# Altium PCB vlc_ctrl_T67.PcbDoc
Units mil, origin at the board's own origin, x right, y up, seen from the top; angles counter-clockwise.
Board outline 1000 x 850 mil, 2 copper layers (Top Layer, Bottom Layer); 16 components, 12 nets, 46 pads, 1 vias.
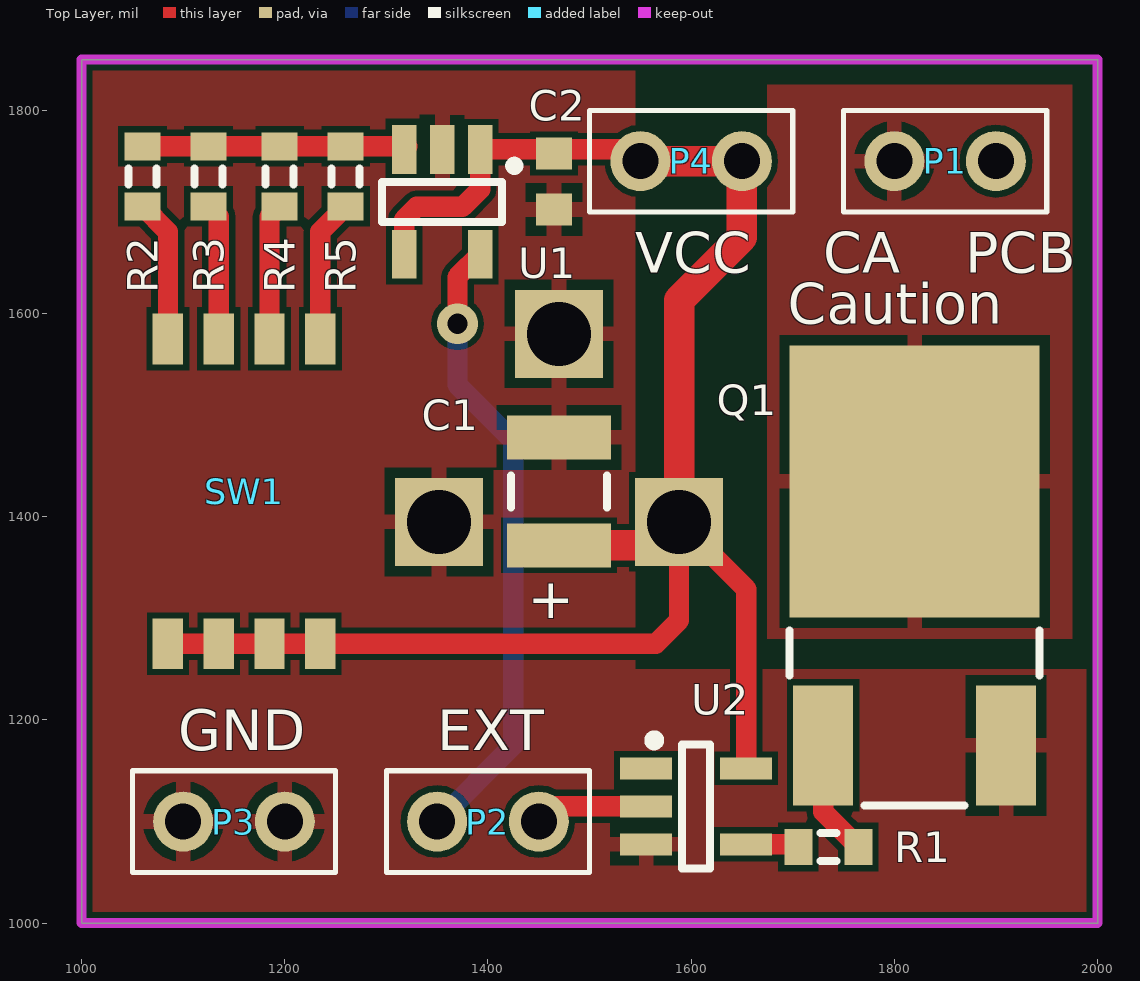
[diagram p0: Top Layer view]
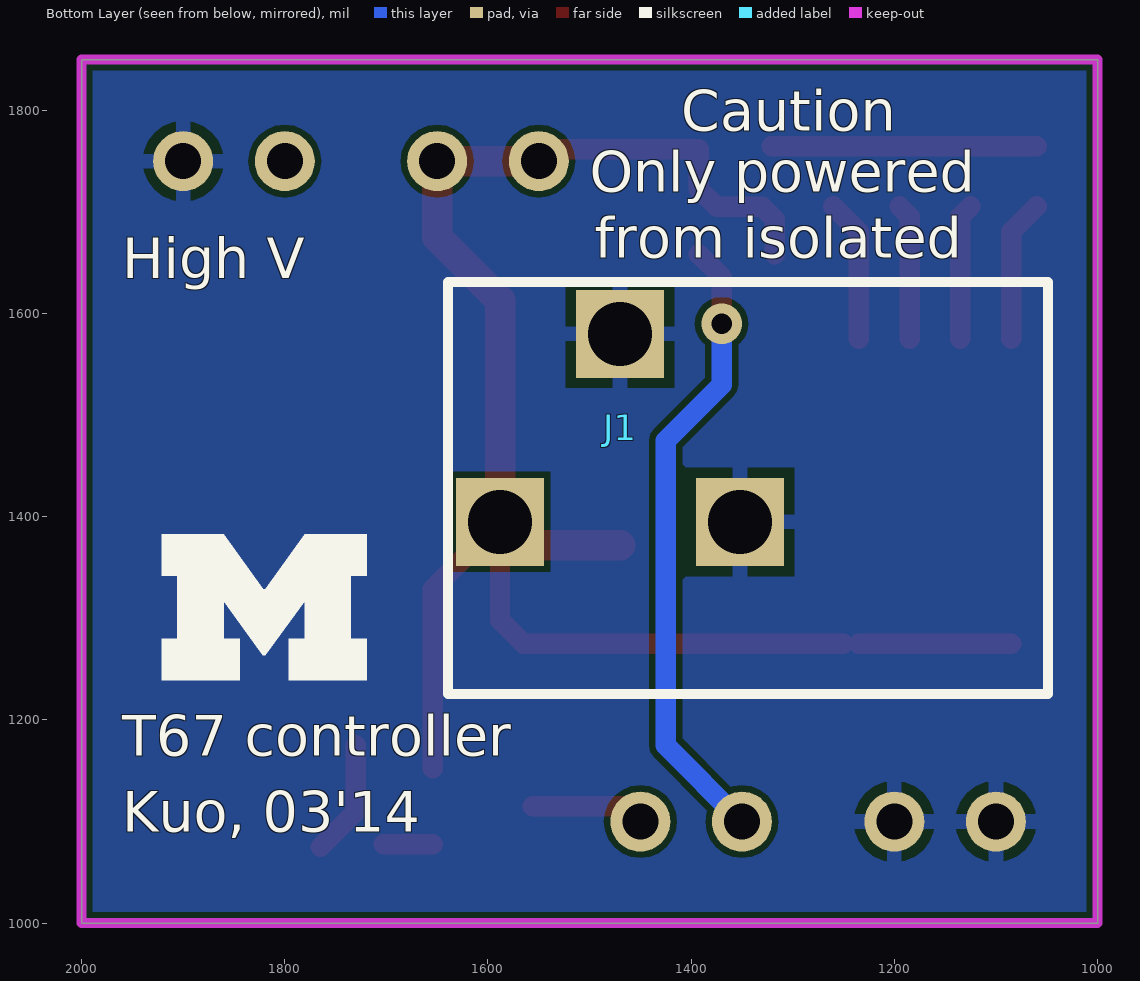
[diagram p1: Bottom Layer view, seen from below]

## Layer stack, top to bottom
Top Solder: solder mask 0.4, Solder Resist, Dk 3.5
Top Layer: signal copper 1.4
Dielectric 1: dielectric 12.6, FR-4, Dk 4.8
Bottom Layer: signal copper 1.4
Bottom Solder: solder mask 0.4, Solder Resist, Dk 3.5

## Board outline
1000,1000 1000,1850 2000,1850 2000,1000

## Design rules (kind name [scope] priority, off if disabled: settings)
Clearance "Clearance~Sunstone Circuits" [All] p1: gap=6 // Sunstone Circuits Minimum Clearance Rule (Double Sided)
HoleSize "HoleSize~Sunstone Circuits" [All] p1: absolutevalues=TRUE maxlimit=251 minlimit=16 maxpercent=80.000 minpercent=20.000 // SSC Hole Size Rule For Single Sided & Double Sided Designs.
HoleSize Testpoint [All] p2: absolutevalues=TRUE maxlimit=100 minlimit=1 maxpercent=80.000 minpercent=20.000
HoleSize TestPointUsage [All] p3: absolutevalues=TRUE maxlimit=100 minlimit=1 maxpercent=80.000 minpercent=20.000
MinimumAnnularRing "MinimumAnnularRing~Sunstone Circuits" [All] p1: minimumring=7 // Sunstone Circuits Minimum Annular Ring (Double Sided)
PlaneClearance "PlaneClearance~Sunstone Circuits" [All] p1: clearance=12 // Sunstone Circuits Power Plane Clearance Rule (Double Sided)
PlaneConnect "PlaneConnect~Sunstone Circuits" [All] p1: planeconnectstyle=Relief reliefexpansion=10 reliefentries=4 reliefconductorwidth=8 reliefairgap=10 // Sunstone Circuits Power Plane Connect Rule (Double Sided)
PolygonConnect "PolygonConnect~Sunstone Circuits" [All] p1: connectstyle=Relief reliefconductorwidth=15 reliefentries=4 polygonreliefangle="90 Angle" airgapwidth=10 // Sunstone Circuits Polygon Connect Style (Double Sided)
RoomDefinition vlc_ctrl_T67 [InComponentClass('vlc_ctrl_T67')] p1: confinementstyle=ConfineIn formatcopy=TRUE lockcomponents=FALSE outline 1026.38,1675.79 1026.38,1794.21 1282.01,1794.21 1282.01,1798.59 1487.5,1798.59 1487.5,1812.5 1962.5,1812.5 1962.5,1687.5 1959.92,1687.5 1959.92,1102.01 1848.62,1102.01 1848.62,1045.79 1695.71,1045.79 1695.71,1038.07 1512.5,1038.07 1512.5,1037.5 1037.5,1037.5 1037.5,1210.71 1031.35,1210.71 1031.35,1675.79
RoutingVias "RoutingVias~Sunstone Circuits" [All] p1: holewidth=16 width=30 viastyle="Through Hole" minholewidth=16 minwidth=30 maxholewidth=20 maxwidth=40 // Sunstone Circuits Routing Vias Rule (Double Sided)
ShortCircuit "ShortCircuit~Sunstone Circuits" [All] p1: allowed=FALSE // Sunstone Circuits Short Circuit Rule~Do Not Allow (Double Sided)
SolderMaskExpansion "SolderMaskExpansion~Sunstone Circuits" [All] p1: expansion=3 // Sunstone Circuits Solder Mask Expansion Rule (Double Sided)
ViasUnderSMD "ViasUnderSMD~Sunstone Circuits" [All] p1: allowed=FALSE // Sunstone Circuits Vias Under SMD~Do Not Allow (Double Sided)
Width "Width~Sunstone Circuits" [All] p1: maxlimit=100 minlimit=6 preferedwidth=10 // Sunstone Circuits Minimum Width Rule (Double Sided)
25 further rules are at their usual default settings.

## Components (designator, comment, footprint, x,y, rotation, side; value= is the part's Value field where it differs from the comment)
C1 "Cap Semi" C1210 1470,1425 r270 top
C2 "Cap Semi" 1608[0603] 1465,1730 r90 top
J1 "PJ-102AH" PJ-102AH 1470,1395 r270 bottom
P1 "1 x 2 header" "1x2 header" 1850,1750 r0 top
P2 "1 x 2 header" "1x2 header" 1400,1100 r0 top
P3 "1 x 2 header" "1x2 header" 1150,1100 r180 top
P4 "1 x 2 header" "1x2 header" 1600,1750 r180 top
Q1 "AOD3N60" TO252 1820,1175 r0 top
R1 "Res3" J1-0603 1735,1075 r180 top
R2 "Res3" J1-0603 1060,1735 r270 top
R3 "Res3" J1-0603 1125,1735 r270 top
R4 "Res3" J1-0603 1195,1735 r270 top
R5 "Res3" J1-0603 1260,1735 r270 top
SW1 "CHS-04TB" CHS04TB 1160,1425 r0 top
U1 "LTC6900" TSOT23 1355,1710 r180 top
U2 "SN74LVC1G17" SOT23-5 1605,1115 r0 top

## Footprints (in the part's own frame and the unit in brackets; to place one, negate y for a bottom-side part, rotate by r counter-clockwise, add the part's x,y. Pads: shape width x height; smd on the part's side, far side on the other; paste and mask are expansions set on the pad)
"1x2 header" [mm] "1x2 header, 100 mils"
  round 1.5 hole 0.9: 1(-1.27,0) 2(1.27,0)
  silkscreen extent -2.54,-1.27 2.54,1.27, body extent -2.53,-1.26 2.53,1.26, height 8.38
1608[0603] [mm] "Chip Capacitor, Body 1.6x0.8mm, IPC High Density"
  rect 0.8x0.9 smd: 1(-0.7,0) 2(0.7,0)
  body extent -0.87,-0.48 0.87,0.48, height 1.3
C1210 [mm] "Chip Capacitor, Body 3.2x2.5mm, IPC High Density"
  rect 1.1x2.6 smd: 1(-1.35,0) 2(1.35,0)
  silkscreen extent -0.4,-1.2 0.4,1.2, body extent -1.7,-1.35 1.7,1.35, height 1.3
CHS04TB [mm] "4 POS DIP SWITCH"
  rect 0.76x1.27 smd: 1(-1.905,-3.81) 2(-1.905,3.81) 3(-0.635,-3.81) 4(-0.635,3.81) 5(0.635,-3.81) 6(0.635,3.81) 7(1.905,-3.81) 8(1.905,3.81)
J1-0603 [mm] "Chip Resistor, Body 1.6x0.8mm, IPC High Density"
  rect 0.7x0.9 smd: 1(-0.75,0) 2(0.75,0)
  silkscreen extent -0.2,-0.35 0.2,0.35, body extent -0.85,-0.48 0.85,0.48, height 0.9
PJ-102AH [mm] "Power Jack"
  rect 2.2x2.2 hole 1.6: 1(0,-3) 2(0,3) 3(-4.7,0)
  silkscreen extent -6,-4.3 4.3,10.7, body extent -5.75,-3.99 4.08,10.89, height 10
SOT23-5 [mm] "SOT23, 5-Leads, Body 2.9x1.6mm, Pitch 0.95mm, Lead Span 2.8mm, IPC High Density"
  rect 1.3x0.55 smd: 1(-1.25,0.95) 2(-1.25,0) 3(-1.25,-0.95) 4(1.25,-0.95) 5(1.25,0.95)
  silkscreen extent -1.17,-1.55 0.35,1.77, body extent -0.67,-1.5 0.65,1.5, height 1.45
TO252 [mm] "TO252-3"
  rect 1.5x3 smd: 1(-2.286,0) 3(2.286,0)
  rect 6.25x6.8 smd: 4(0,6.6)
  silkscreen extent -3.13,-1.5 3.13,2.88, body extent -3.3,2.98 3.3,9.08, height 2.3
TSOT23 [mm]
  rect 0.62x1.22 smd: 1(-0.95,-1.31) 2(0,-1.31) 3(0.95,-1.31) 4(0.95,1.31) 5(-0.95,1.31)
  silkscreen extent -1.9,-1 1.5,0.5

## Part data
C1 C2: "Capacitor (Semiconductor SIM Model)"
J1: "CONN PWR JACK 2.1X5.5MM HIGH CUR"
P1 P2 P3 P4: "100 mils standard header"
Q1: "600V,2.5A N-Channel MOSFET"
R1 R2 R3 R4 R5: "Resistor"
SW1: "SLIDE SWITCHES"
U1: "Low Power, 1kHz to 20MHz   Resistor Set SOT-23 Oscillator"
U2: "SINGLE SCHMITT-TRIGGER BUFFER"

## Via types
v1: diameter 40, hole 20, Top Layer to Bottom Layer, 1 vias

## Nets (pads, with @x,y where several pads share a name; then routed paths per layer and width w, separated by ;. In a path a pad name is that pad's centre, name@x,y a point inside that pad or via, vN(x,y) a via of type N, cw(c..) or ccw(c..) an arc to the next point about the centre after c; other vN are vias at no path point)
GND: C1.1 C2.1 J1.2 J1.3 P1.2 P3.1 P3.2 Q1.3 U1.2 U2.3
NetP1_1: P1.1 Q1.4
NetP2_1: P2.1 U1.5 | length 621.6
  Top Layer w20: v1(1370,1590) 1370,1636.02 U1.5
  Bottom Layer w20: P2.1 1425,1175 1425,1475 1370,1530 v1(1370,1590)
NetP2_2: P2.2 U2.2 | length 112
  Top Layer w20: P2.2 1465,1115 U2.2
NetQ1_1: Q1.1 R1.1 | length 114.3
  Top Layer w20: Q1.1 1730,1109.53 R1.1
NetR1_2: R1.2 U2.4 | length 48.7
  Top Layer w20: U2.4 R1.2@1702.87,1077.6
NetR2_1: R2.1 R3.1 R4.1 R5.1 U1.3 | length 260.6
  Top Layer w20: R2.1 R3.1 R4.1 R5.1 U1.3@1320.55,1764.53
NetR2_2: R2.2 SW1.2 | length 140.8
  Top Layer w20: R2.2 1085,1680.47 SW1.2
NetR3_2: R3.2 SW1.4 | length 134.6
  Top Layer w20: R3.2 1135,1695.47 SW1.4
NetR4_2: R4.2 SW1.6 | length 134.6
  Top Layer w20: SW1.6 1185,1695.47 R4.2
NetR5_2: R5.2 SW1.8 | length 140.8
  Top Layer w20: SW1.8 1235,1680.47 R5.2
VCC5: C1.2 C2.2 J1.1 P4.1 P4.2 SW1.1 SW1.3 SW1.5 SW1.7 U1.1 U1.4 U2.5 | length 1795.8
  Top Layer w20: SW1.1 SW1.3 SW1.5 SW1.7 ; 1250,1275 1565,1275 1588.11,1298.11 J1.1 1654.21,1328.9 U2.5 ; U1.4 1317.6,1692.6 1330,1705 1375,1705 1392.4,1722.4 U1.1 1538.43,1761.57 P4.2
  Top Layer w30: C1.2 1564.96,1371.85 J1.1 1588.11,1613.11 1650,1675 P4.1 P4.2
pads on no net: U2.1

## Polygon pours and split planes (outlines as drawn)
GND on Bottom Layer "Bottom Layer-No Net" (solid, pour order 8): 1000,1000 2000,1000 2000,1850 1000,1850
NetP1_1 on Top Layer "Bottom Layer-No Net" (solid, pour order 2): 1675,1280 1975,1280 1975,1825 1675,1825
GND on Top Layer "Bottom Layer-No Net" (solid, pour order 6): 2000,1250 2000,1000 1000,1000 1000,1850 1545,1850 1545,1250

## Keep-outs
Keep-Out Layer:
  the board outline again, w10

## Silkscreen, mask and mechanical layers (free items; w line width, h text height)
Top Overlay:
  text "VCC" at 1545,1640 h40
  text "CA" at 1730,1640 h40
  text "PCB" at 1870,1640 h40
  text "Caution" at 1695,1590 h40
  text "+" at 1485,1300 h40
  text "GND" at 1095,1170 h40
  text "EXT" at 1350,1170 h40
Bottom Overlay:
  region: 1920.96,1239.04 1844.23,1239.04 1844.23,1280 1859.84,1280 1859.84,1317.06 1821.8,1263.74 1819.2,1263.74 1780.51,1317.06 1780.51,1280 1796.12,1280 1796.12,1239.04 1719.4,1239.04 1719.4,1280 1735,1280 1735,1341.77 1719.4,1341.77 1719.4,1382.73 1780.19,1382.73 1819.2,1328.76 1821.15,1328.76 1860.16,1382.73 1920.96,1382.73 1920.96,1341.77 1906,1341.77 1906,1280 1920.96,1280
  text "Caution" at 1410,1780 h40
  text "Only powered" at 1500,1720 h40
  text "from isolated" at 1495,1655 h40
  text "High V" at 1960,1635 h40
  text "T67 controller" at 1960,1165 h40
  text "Kuo, 03'14" at 1960,1090 h40